# Altium PCB ICEBoard_rev1.1.PcbDoc
Units mm, origin at the board's own origin, x right, y up, seen from the top; angles counter-clockwise.
Board outline 120.6 x 95.3 mm, 2 copper layers (Top Layer, Bottom Layer); 43 components, 36 nets, 187 pads, 27 vias.
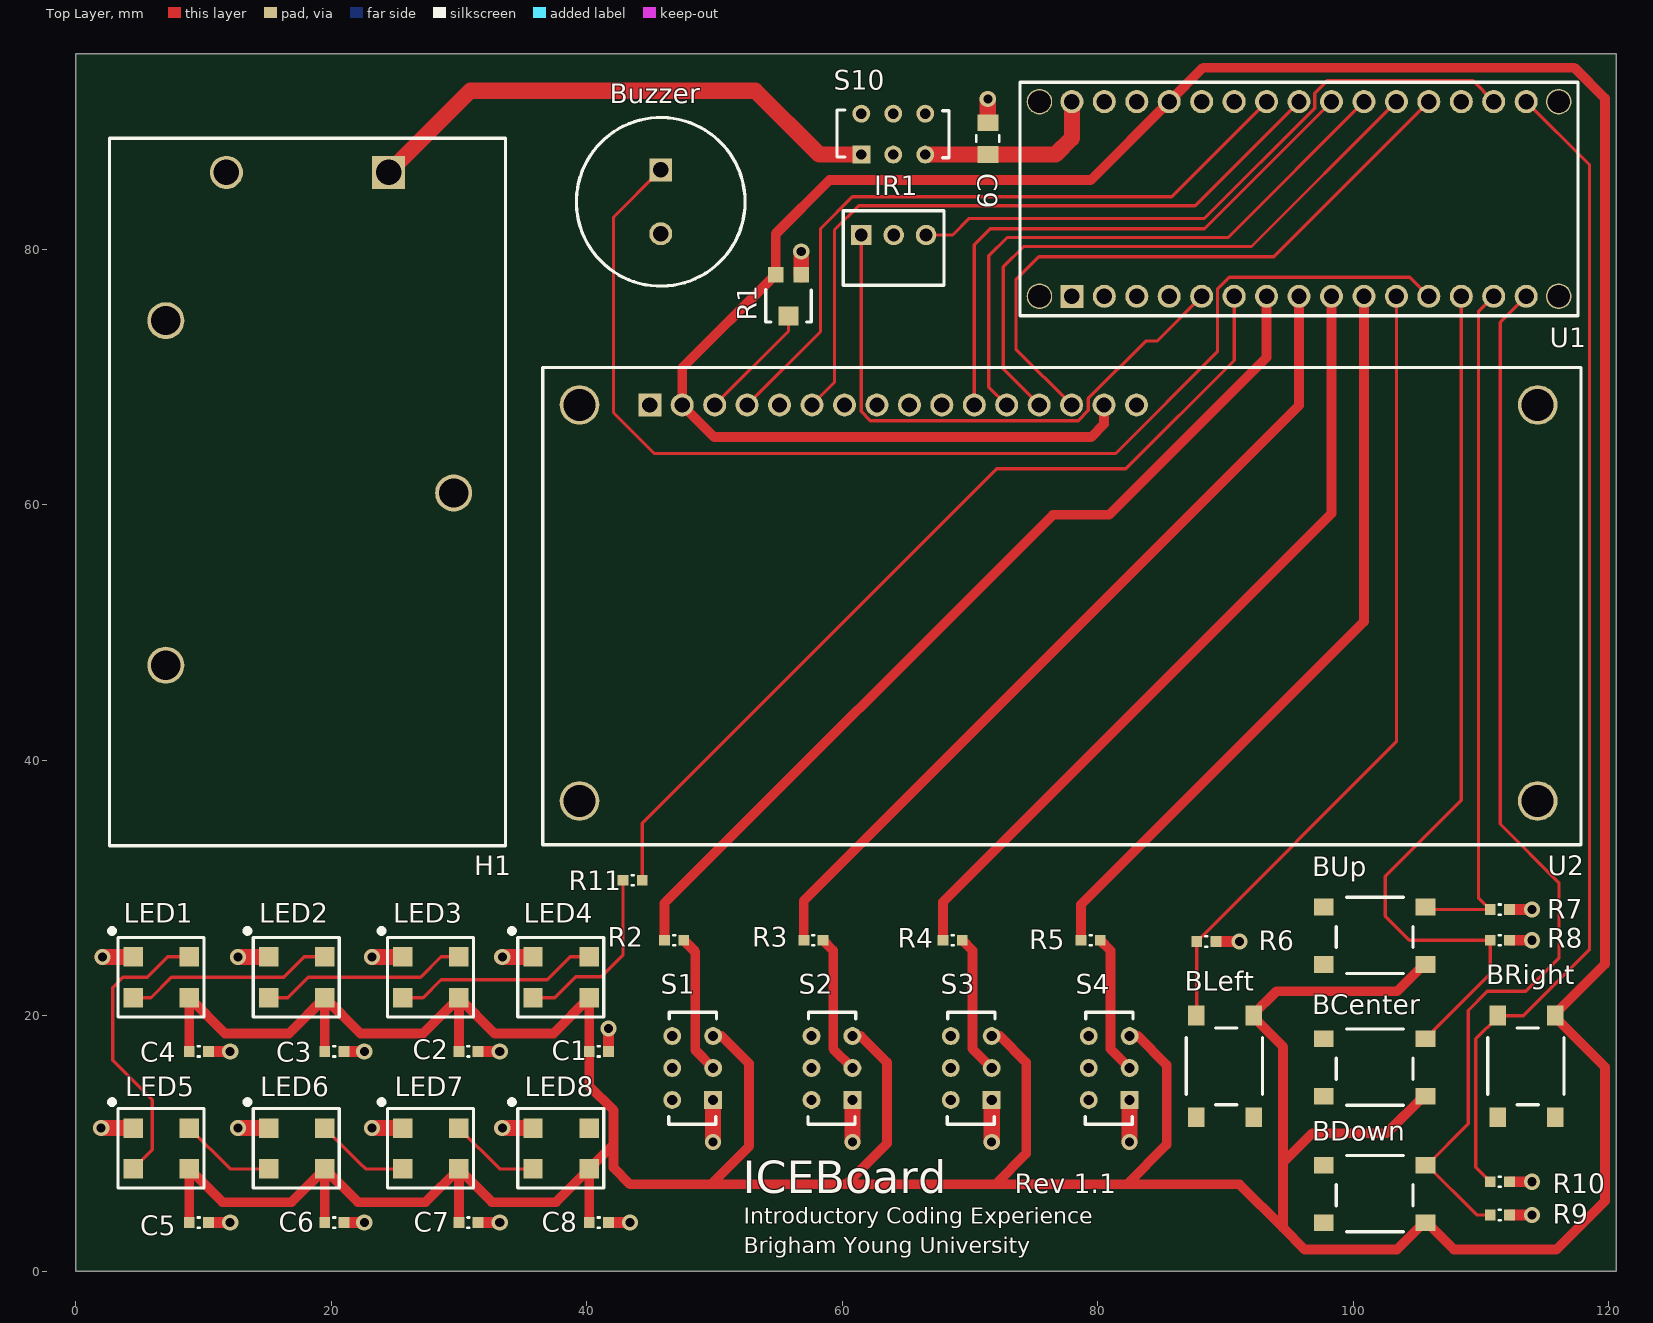
[diagram p0: Top Layer view]
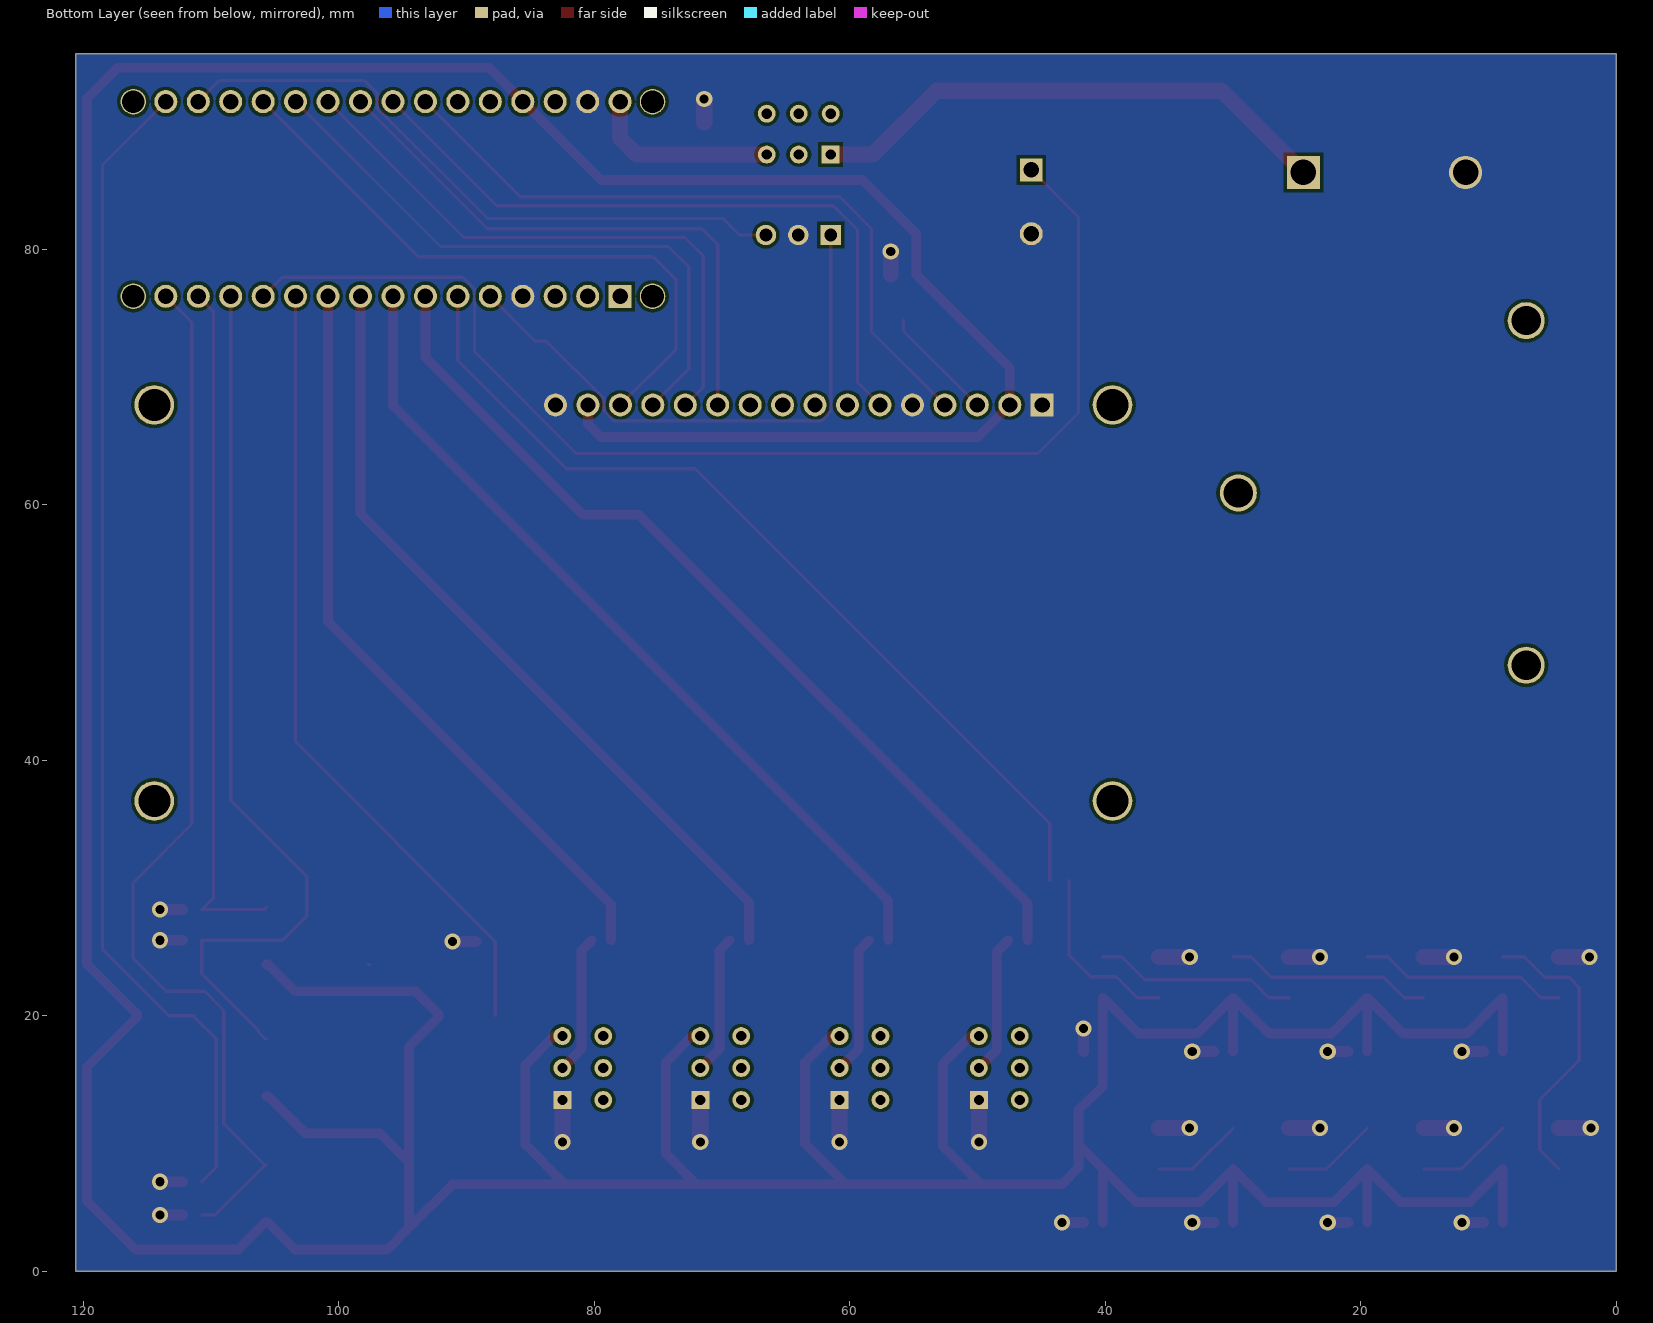
[diagram p1: Bottom Layer view, seen from below]

## Layer stack, top to bottom
Top Solder: solder mask 0.0102, Solder Resist, Dk 3.5
Top Layer: signal copper 0.0356
Dielectric 1: dielectric 0.32, FR-4, Dk 4.8
Bottom Layer: signal copper 0.0356
Bottom Solder: solder mask 0.0102, Solder Resist, Dk 3.5

## Board outline
0,0 120.6,0 120.6,95.3 0,95.3

## Design rules (kind name [scope] priority, off if disabled: settings)
Clearance [All] p1: gap=0.254 ignorepadtopadclearanceinfootprint=FALSE except(0: Arc-Hole Track-Hole SMDPad-Hole THPad-Hole Via-Hole Fill-Hole Poly-Hole Region-Hole Text-Hole; 0.203: Arc-THPad Track-THPad)
PolygonConnect [All] p1: connectstyle=Direct reliefconductorwidth=0.254 reliefentries=4 polygonreliefangle="90 Angle" airgapwidth=0.254
RoutingVias [All] p1: holewidth=0.711 width=1.27 viastyle="Through Hole" minholewidth=0.711 minwidth=1.27 maxholewidth=0.711 maxwidth=1.27
SolderMaskExpansion [All] p1: expansion=0.102
UnRoutedNet [All] p1: checkbadconnections=TRUE
Width [All] p1: maxlimit=1.27 minlimit=0.254 preferedwidth=0.254 minimp=50.000000 maximp=50.000000 favimp=50.000000
29 further rules are at their usual default settings.

## Components (designator, comment, footprint, x,y, rotation, side; value= is the part's Value field where it differs from the comment)
BCenter "Tactile Switch" PTS645 97.7,18.2 r0 top
BDown "Tactile Switch" PTS645 97.7,8.3 r0 top
BLeft "Tactile Switch" PTS645 87.7,12.05 r90 top
BRight "Tactile Switch" PTS645 111.3,12.05 r90 top
BUp "Tactile Switch" PTS645 97.7,28.5 r0 top
Buzzer "Buzzer" TP124005 45.8,86.2 r0 top
C1 "0.1u" CAPACITOR 40.95,17.2 r0 top
C2 "0.1u" CAPACITOR 30.75,17.2 r0 top
C3 "0.1u" CAPACITOR 20.25,17.2 r0 top
C4 "0.1u" CAPACITOR 9.65,17.2 r0 top
C5 "0.1u" CAPACITOR 9.65,3.8 r0 top
C6 "0.1u" CAPACITOR 20.25,3.8 r0 top
C7 "0.1u" CAPACITOR 30.75,3.8 r0 top
C8 "0.1u" CAPACITOR 40.95,3.8 r0 top
C9 "10u" PCBComponent_1 71.4,88.65 r90 top
H1 "Battery Holder" BH9VPC 24.5,86 r90 top
IR1 "IR Receiver" TSOP382 61.49,81.1 r90 top
LED1 "NeoPixel" NEOPIXEL 4.5,24.6 r180 top
LED2 "NeoPixel" NEOPIXEL 15.1,24.6 r180 top
LED3 "NeoPixel" NEOPIXEL 25.6,24.6 r180 top
LED4 "NeoPixel" NEOPIXEL 35.8,24.6 r180 top
LED5 "NeoPixel" NEOPIXEL 4.5,11.2 r180 top
LED6 "NeoPixel" NEOPIXEL 15.1,11.2 r180 top
LED7 "NeoPixel" NEOPIXEL 25.6,11.2 r180 top
LED8 "NeoPixel" NEOPIXEL 35.8,11.2 r180 top
R1 "10k" TC33X 55.8,76.2 r180 top
R2 "100" Resistor1608 46.85,25.9 r0 top
R3 "100" Resistor1608 57.75,25.9 r0 top
R4 "100" Resistor1608 68.65,25.9 r0 top
R5 "100" Resistor1608 79.45,25.9 r0 top
R6 "10k" Resistor1608 88.5,25.8 r180 top
R7 "10k" Resistor1608 111.475,28.3 r180 top
R8 "10k" Resistor1608 111.475,25.9 r180 top
R9 "10k" Resistor1608 111.475,4.4 r180 top
R10 "10k" Resistor1608 111.475,7 r180 top
R11 "470" Resistor1608 43.6,30.6 r180 top
S1 "=value" MHSS1104 49.9,13.4 r90 top
S2 "=value" MHSS1104 60.8,13.4 r90 top
S3 "=value" MHSS1104 71.7,13.4 r90 top
S4 "=value" MHSS1104 82.5,13.4 r90 top
S10 "=value" MHSS1104 61.5,87.4 r0 top
U1 "Arduino Nano" ARDUINONANO 77.98,76.3 r0 top
U2 "LCD Screen" TC1602A-01T 44.94,67.8 r0 top

## Footprints (in the part's own frame and the unit in brackets; to place one, negate y for a bottom-side part, rotate by r counter-clockwise, add the part's x,y. Pads: shape width x height; smd on the part's side, far side on the other; paste and mask are expansions set on the pad)
ARDUINONANO [mm]
  rect 1.8x1.8 hole 1.2: 1(0,0)
  round 1.8 hole 1.2: 2(2.54,0) 3(5.08,0) 4(7.62,0) 5(10.16,0) 6(12.7,0) 7(15.24,0) 8(17.78,0) 9(20.32,0) 10(22.86,0) 11(25.4,0) 12(27.94,0) 13(30.48,0) 14(33.02,0) 15(35.56,0) 16(35.56,15.24) 17(33.02,15.24) 18(30.48,15.24) 19(27.94,15.24) 20(25.4,15.24) 21(22.86,15.24) 22(20.32,15.24) 23(17.78,15.24) 24(15.24,15.24) 25(12.7,15.24) 26(10.16,15.24) 27(7.62,15.24) 28(5.08,15.24) 29(2.54,15.24) 30(0,15.24)
  round 2 hole 1.778: 31(-2.54,15.24) 32(38.1,15.24) 33(38.1,0) 34(-2.54,0)
  silkscreen extent -4.06,-1.52 39.62,16.76, body extent -3.81,-1.14 41.27,16.45, height 8
BH9VPC [mm]
  rect 2.6x2.6 hole 2: 1(0,0)
  round 2.6 hole 2: 2(0,12.7)
  round 2.9 hole 2.29: 3(-11.6,17.44) 4(-25.09,-5.09) 5(-38.57,17.44)
  silkscreen extent -52.7,-9.14 2.67,21.84, body extent -52.12,-8.64 2.22,21.34, height 20.62
CAPACITOR [mm]
  rect 0.85x0.85 smd: 1(-0.75,0) 2(0.75,0)
  silkscreen extent -0.08,-0.4 0.08,0.4, body extent -0.85,-0.45 0.85,0.45, height 0.9
MHSS1104 [mm]
  rect 1.4x1.4 hole 0.8: 1(0,0)
  round 1.4 hole 0.8: 2(2.5,0) 3(5,0) 4(0,3.2) 5(2.5,3.2) 6(5,3.2)
  silkscreen extent -1.91,-0.25 6.86,3.48, body extent -1.78,-0.25 6.73,3.43, height 5.5
NEOPIXEL [mil]
  rect 60x60 smd: 1(0,0) 2(0,125.98) 3(-173.23,125.98) 4(-173.23,0)
  silkscreen extent -218,-85 70,185, body extent -183,-35 12,160, height 63
PCBComponent_1 [mm]
  rect 1.3x1.65 smd: 1(-1.25,0) 2(1.25,0)
  silkscreen extent -0.25,-0.89 0.25,0.89, body extent -1.05,-0.67 1.05,0.68, height 1.35
PTS645 [mm]
  rect 1.55x1.3 smd: 1(0,0) 2(7.95,0) 3(0,-4.5) 4(7.95,-4.5)
  silkscreen extent 0.97,-5.21 6.98,0.76, body extent 0.97,-5.25 6.98,0.75, height 4.3
Resistor1608 [mm]
  rect 0.85x0.85 smd: 1(-0.75,0) 2(0.75,0)
  silkscreen extent -0.08,-0.4 0.08,0.4, body extent -0.8,-0.4 0.8,0.4, height 0.45
TC33X [mm]
  rect 1.2x1.2 smd: 1(-1,-1.8) 3(1,-1.8)
  rect 1.6x1.5 smd: 2(0,1.45)
  silkscreen extent -1.78,-0.63 1.78,1.91, body extent -1.8,-1.91 1.8,2.05, height 1.13
TC1602A-01T [mm]
  rect 1.8x1.8 hole 1.2: 1(0,0)
  round 1.8 hole 1.2: 2(2.54,0) 3(5.08,0) 4(7.62,0) 5(10.16,0) 6(12.7,0) 7(15.24,0) 8(17.78,0) 9(20.32,0) 10(22.86,0) 11(25.4,0) 12(27.94,0) 13(30.48,0) 14(33.02,0) 15(35.56,0) 16(38.1,0)
  round 3.1 hole 2.5: 17(-5.5,0) 18(69.5,0) 19(69.5,-31) 20(-5.5,-31)
  silkscreen extent -8.38,-34.42 72.9,2.92, body extent -8,-34 72.5,2.5, height 13.5
TP124005 [mm]
  rect 1.8x1.8 hole 1.2: 1(0,0)
  round 1.8 hole 1.2: 2(0,-5)
  silkscreen extent -6.6,-9.1 6.6,4.1, body extent -6.2,-8.7 6.2,3.7, height 7.3
TSOP382 [mm]
  rect 1.6x1.6 hole 1: 1(0,0)
  round 1.6 hole 1: 2(0,-2.54) 3(0,-5.08)
  silkscreen extent -3.94,-6.48 1.91,1.4, body extent -3.4,-5.04 1.4,-0.04, height 8.55

## Part data
BCenter BDown BLeft BRight BUp: library part PTS645
Buzzer: library part TP124005
C1 C2 C3 C4 C5 C6 C7 C8 C9: library part Capacitor
H1: library part BH9VPC
IR1: library part TSOP382
R1: library part "Resistor - Variable"
R2 R3 R4 R5 R6 R7 R8 R9 R10 R11: library part Resistor
S1 S2 S3 S4 S10: library part MHSS1104
U1: library part ArduinoNano
U2: library part TC1602A-01T

## Via types
v1: diameter 1.27, hole 0.711, Top Layer to Bottom Layer, 27 vias

## Nets (pads, with @x,y where several pads share a name; then routed paths per layer and width w, separated by ;. In a path a pad name is that pad's centre, name@x,y a point inside that pad or via, vN(x,y) a via of type N, cw(c..) or ccw(c..) an arc to the next point about the centre after c; other vN are vias at no path point)
+9: C9.1 S10.3 U1.30 | length 14.9
  Top Layer w1.27: S10.3 C9.1 76.7,87.4 77.98,88.68 U1.30
GND: Buzzer.2 C1.2 C2.2 C3.2 C4.2 C5.2 C6.2 C7.2 C8.2 C9.2 H1.2 IR1.2 LED1.1 LED2.1 LED3.1 LED4.1 LED5.1 LED6.1 LED7.1 LED8.1 R1.1 R6.1 R7.1 R8.1 R9.1 R10.1 S1.1 S2.1 S3.1 S4.1 U1.4 U1.29 U2.1 U2.5 U2.16 | length 58.4
  Top Layer w0.254: LED4.1@35.7,24.7 LED4.1 ; S1.1@49.9,13.2 S1.1 ; S4.1@82.5,13.2 S4.1 ; R7.1@112.2,28.325 R7.1
  Top Layer w0.85: C5.2 v1(12.1,3.8) ; C4.2 v1(12.1,17.2) ; C6.2 v1(22.6,3.8) ; C3.2 v1(22.6,17.2) ; C7.2 v1(33.2,3.8) ; C2.2 v1(33.2,17.2) ; C8.2 v1(43.4,3.8) ; C1.2 v1(41.7,19) ; R6.1 v1(91.1,25.8) ; R9.1 v1(114,4.4) ; R10.1 v1(114,7) ; R8.1 v1(114,25.9) ; R7.1 v1(114,28.3)
  Top Layer w1.2: R1.1 v1(56.8,79.8)
  Top Layer w1.27: v1(2,11.2) LED5.1 ; v1(2.1,24.6) LED1.1 ; v1(12.7,11.2) LED6.1 ; v1(12.7,24.6) LED2.1 ; v1(23.2,11.2) LED7.1 ; v1(23.2,24.6) LED3.1 ; v1(33.4,11.2) LED8.1 ; v1(33.4,24.6) LED4.1 ; v1(49.9,10.1) S1.1@49.9,13.2 ; v1(60.8,10.1) S2.1@60.8,13.2 ; C9.2 v1(71.4,91.75) ; v1(71.7,10.1) S3.1@71.7,13.2 ; v1(82.5,10.1) S4.1@82.5,13.2
NetBCenter_2: BCenter.2 R8.2 U1.13 | length 69.9
  Top Layer w0.254: BCenter.2 105.775,18.2 106.298,18.723 106.298,18.848 110.725,23.275 R8.2 104.4,25.9 102.505,27.795 102.505,30.905 108.46,36.86 U1.13
NetBCenter_4: BCenter.4 BDown.4 BLeft.4 BRight.4 BUp.4 C1.1 C2.1 C3.1 C4.1 C5.1 C6.1 C7.1 C8.1 LED1.3 LED2.3 LED3.3 LED4.3 LED5.3 LED6.3 LED7.3 LED8.3 R1.3 S1.3 S2.3 S3.3 S4.3 U1.27 U2.2 U2.15 | length 522.3
  Top Layer w0.762: C5.1 LED5.3 11.5,5.4 16.9,5.4 LED6.3 ; C4.1 LED1.3 11.7,18.6 16.7,18.6 LED2.3 ; C6.1 LED6.3 ; C3.1 LED2.3 ; C7.1 LED7.3 ; C2.1 LED3.3 ; C8.1 LED8.3 ; S1.3 50.55,18.4 52.7,16.25 52.7,9.768 49.8,6.868 49.8,6.8 ; S2.3 61.45,18.4 63.5,16.35 63.5,10 60.3,6.8 ; S3.3 72.35,18.4 74.4,16.35 74.4,9.2 72,6.8 ; U2.15 80.5,66.3 79.5,65.3 49.98,65.3 U2.2 47.48,70.68 R1.3 54.8,81.2 59,85.4 79.46,85.4 U1.27 88.26,94.2 117.3,94.2 119.7,91.8 119.7,24.025 115.8,20.125 BRight.4 115.8,19.875 119.7,15.975 119.7,5.5 115.9,1.7 107.875,1.7 105.775,3.8 BDown.4 105.525,3.8 103.425,1.7 96.2,1.7 94.5,3.4 ; S4.3 83.15,18.4 85.4,16.15 85.4,9.9 82.3,6.8 ; BCenter.4 105.525,13.7 102.625,10.8 96.8,10.8 94.5,8.5 ; BUp.4 105.525,24 103.425,21.9 93.975,21.9 92.2,20.125 BLeft.4 92.2,19.875 94.5,17.575 94.5,8.5 ; LED6.3 22.1,5.4 27.4,5.4 LED7.3 ; LED2.3 22.3,18.6 27.2,18.6 LED3.3 ; LED7.3 32.6,5.4 37.6,5.4 LED8.3 ; LED3.3 32.8,18.6 37.4,18.6 LED4.3 C1.1 40.2,14.5 42.1,12.6 42.1,9.9 ; LED8.3 42.1,9.9 ; 42.1,9.9 42.1,8.1 43.4,6.8 49.8,6.8 ; 49.8,6.8 60.3,6.8 ; 60.3,6.8 72,6.8 ; 72,6.8 82.3,6.8 ; 82.3,6.8 91.1,6.8 94.5,3.4 ; 94.5,3.4 94.5,8.5
NetBDown_2: BDown.2 R9.2 U1.15 | length 83.5
  Top Layer w0.254: BDown.2 BDown.2@105.775,8.3 ; R9.2 109.675,4.4 BDown.2@105.775,8.3 ; U1.15 111.5,74.26 111.5,35 116.1,30.4 116.1,24.5 113.5,21.9 110.5,21.9 109,20.4 109,11.525 BDown.2@105.775,8.3
NetBLeft_2: BLeft.2 R6.2 U1.11 | length 62.8
  Top Layer w0.254: BLeft.2 87.75,20.05 R6.2 103.38,41.43 U1.11
NetBRight_2: BRight.2 R10.2 U1.16 | length 91.9
  Top Layer w0.254: R10.2 109.6,8.125 109.6,18.175 111.3,19.875 BRight.2 113.3,20 118.5,25.2 118.5,86.58 U1.16
NetBUp_2: BUp.2 R7.2 U1.14 | length 54
  Top Layer w0.254: BUp.2 105.85,28.3 R7.2 109.8,29.225 109.8,75.1 U1.14
NetBuzzer_1: Buzzer.1 U1.12 | length 94.9
  Top Layer w0.254: Buzzer.1 42.1,82.5 42.1,67.2 45.3,64 81.4,64 89.37,71.97 89.37,76.862 90.308,77.8 104.42,77.8 U1.12
NetH1_1: H1.1 S10.1 | length 41.7
  Top Layer w1.27: H1.1 30.9,92.4 53.2,92.4 58.2,87.4 S10.1
NetIR1_1: IR1.1 U1.5 | length 45.3
  Top Layer w0.254: IR1.1 61.49,67.29 62.21,66.57 78.47,66.57 79.27,67.37 79.27,68.31 83.76,72.8 84.64,72.8 U1.5
NetIR1_3: IR1.3 U1.17 | length 50.8
  Top Layer w0.254: IR1.3 68.64,81.1 69.94,82.4 88.36,82.4 96.99,91.03 96.99,92.19 98,93.2 109.34,93.2 U1.17
NetLED1_2: LED1.2 LED2.4 | length 16.3
  Top Layer w0.254: LED1.2 5.9,21.4 7.5,23 16.3,23 17.9,24.6 LED2.4
NetLED1_4: LED1.4 LED5.2 | length 23.1
  Top Layer w0.254: LED5.2 6,9.5 6,13.4 2.9,16.5 2.9,22.2 3.7,23 5.6,23 7.2,24.6 LED1.4
NetLED2_2: LED2.2 LED3.4 | length 16.2
  Top Layer w0.254: LED2.2 16.6,21.4 18.2,23 27,23 28.6,24.6 LED3.4
NetLED3_2: LED3.2 LED4.4 | length 15.9
  Top Layer w0.254: LED3.2 27.2,21.4 28.6,22.8 36.9,22.8 38.7,24.6 LED4.4
NetLED4_2: LED4.2 R11.2 | length 14.3
  Top Layer w0.254: LED4.2 37.5,21.4 39.15,23.05 41.15,23.05 42.85,24.75 R11.2
NetLED5_4: LED5.4 LED6.2 | length 7.5
  Top Layer w0.254: LED5.4 12.1,8 LED6.2
NetLED6_4: LED6.4 LED7.2 | length 7.8
  Top Layer w0.254: LED6.4 22.4,8.3 22.25,8.45 22.7,8 LED7.2
NetLED7_4: LED7.4 LED8.2 | length 7.1
  Top Layer w0.254: LED7.4 33.2,8 LED8.2
NetR1_2: R1.2 U2.3 | length 9
  Top Layer w0.254: U2.3 55.8,73.58 R1.2@55.8,74.45
NetR2_1: R2.1 U1.7 | length 72.5
  Top Layer w0.762: R2.1 46.1,28.8 76.5,59.2 80.9,59.2 93.22,71.52 U1.7
NetR2_2: R2.2 S1.2 | length 11
  Top Layer w0.762: R2.2 48.5,25 48.5,17.3 S1.2
NetR3_1: R3.1 U1.8 | length 66.5
  Top Layer w0.762: R3.1 57,29 95.76,67.76 U1.8
NetR3_2: R3.2 S2.2 | length 11
  Top Layer w0.762: R3.2 59.3,25.1 59.3,17.4 S2.2
NetR4_1: R4.1 U1.9 | length 63
  Top Layer w0.762: R4.1 67.9,28.9 98.3,59.3 U1.9
NetR4_2: R4.2 S3.2 | length 11
  Top Layer w0.762: R4.2 70.2,25.1 70.2,17.4 S3.2
NetR5_1: R5.1 U1.10 | length 59.6
  Top Layer w0.762: R5.1 78.7,28.7 100.84,50.84 U1.10
NetR5_2: R5.2 S4.2 | length 11
  Top Layer w0.762: R5.2 81,25.1 81,17.4 S4.2
NetR11_1: R11.1 U1.6 | length 70.8
  Top Layer w0.254: R11.1 44.35,35.05 72.1,62.8 82.2,62.8 90.68,71.28 U1.6
NetU1_19: U1.19 U2.14 | length 49.7
  Top Layer w0.254: U2.14 73.6,72.16 73.6,77.6 75.4,79.4 93.78,79.4 U1.19
NetU1_20: U1.20 U2.13 | length 48.1
  Top Layer w0.254: U2.13 72.6,70.62 72.6,78.6 74.2,80.2 92.04,80.2 U1.20
NetU1_21: U1.21 U2.12 | length 46.6
  Top Layer w0.254: U2.12 71.48,69.2 71.48,79.48 72.9,80.9 90.2,80.9 U1.21
NetU1_22: U1.22 U2.11 | length 45.1
  Top Layer w0.254: U2.11 70.34,80.34 71.6,81.6 88.36,81.6 U1.22
NetU1_23: U1.23 U2.6 | length 54.9
  Top Layer w0.254: U2.6 59.4,69.56 59.4,81.5 61.3,83.4 87.62,83.4 U1.23
NetU1_24: U1.24 U2.4 | length 55.2
  Top Layer w0.254: U2.4 58.305,73.545 58.305,81.605 60.8,84.1 85.78,84.1 U1.24
pads on no net: BCenter.1 BCenter.3 BDown.1 BDown.3 BLeft.1 BLeft.3 BRight.1 BRight.3 BUp.1 BUp.3 H1.3 H1.4 H1.5 LED8.4 S1.4 S1.5 S1.6 S2.4 S2.5 S2.6 S3.4 S3.5 S3.6 S4.4 S4.5 S4.6 S10.2 S10.4 S10.5 S10.6 U1.1 U1.2 U1.3 U1.18 U1.25 U1.26 U1.28 U1.31 U1.32 U1.33 U1.34 U2.7 U2.8 U2.9 U2.10 U2.17 U2.18 U2.19 U2.20
copper on no net: | length 0.1
  Top Layer w0.254: 97.575,24 97.7,24

## Polygon pours and split planes (outlines as drawn)
GND on Bottom Layer "Bottom Layer-GND" (solid, pour order 0): 0,95.3 -0.001,0 120.6,0 120.6,95.3

## Silkscreen, mask and mechanical layers (free items; w line width, h text height)
Top Overlay:
  text "ICEBoard" at 52.2,6.1 h2.54
  text "Rev 1.1" at 73.5,6.1 h1.52
  text "Introductory Coding Experience" at 52.3,3.7 h1.27
  text "Brigham Young University" at 52.3,1.4 h1.27
Mechanical 4 (Mech4):
  lines w0.254: 0,0 120.65,0 120.65,95.25 0,95.25 0,0